# Altium PCB PowerBoard.PcbDoc
Units mm, origin at the board's own origin, x right, y up, seen from the top; angles counter-clockwise.
Board outline 99.95 x 99.44 mm, 2 copper layers (Top Layer, Bottom Layer); 81 components, 54 nets, 313 pads, 140 vias.
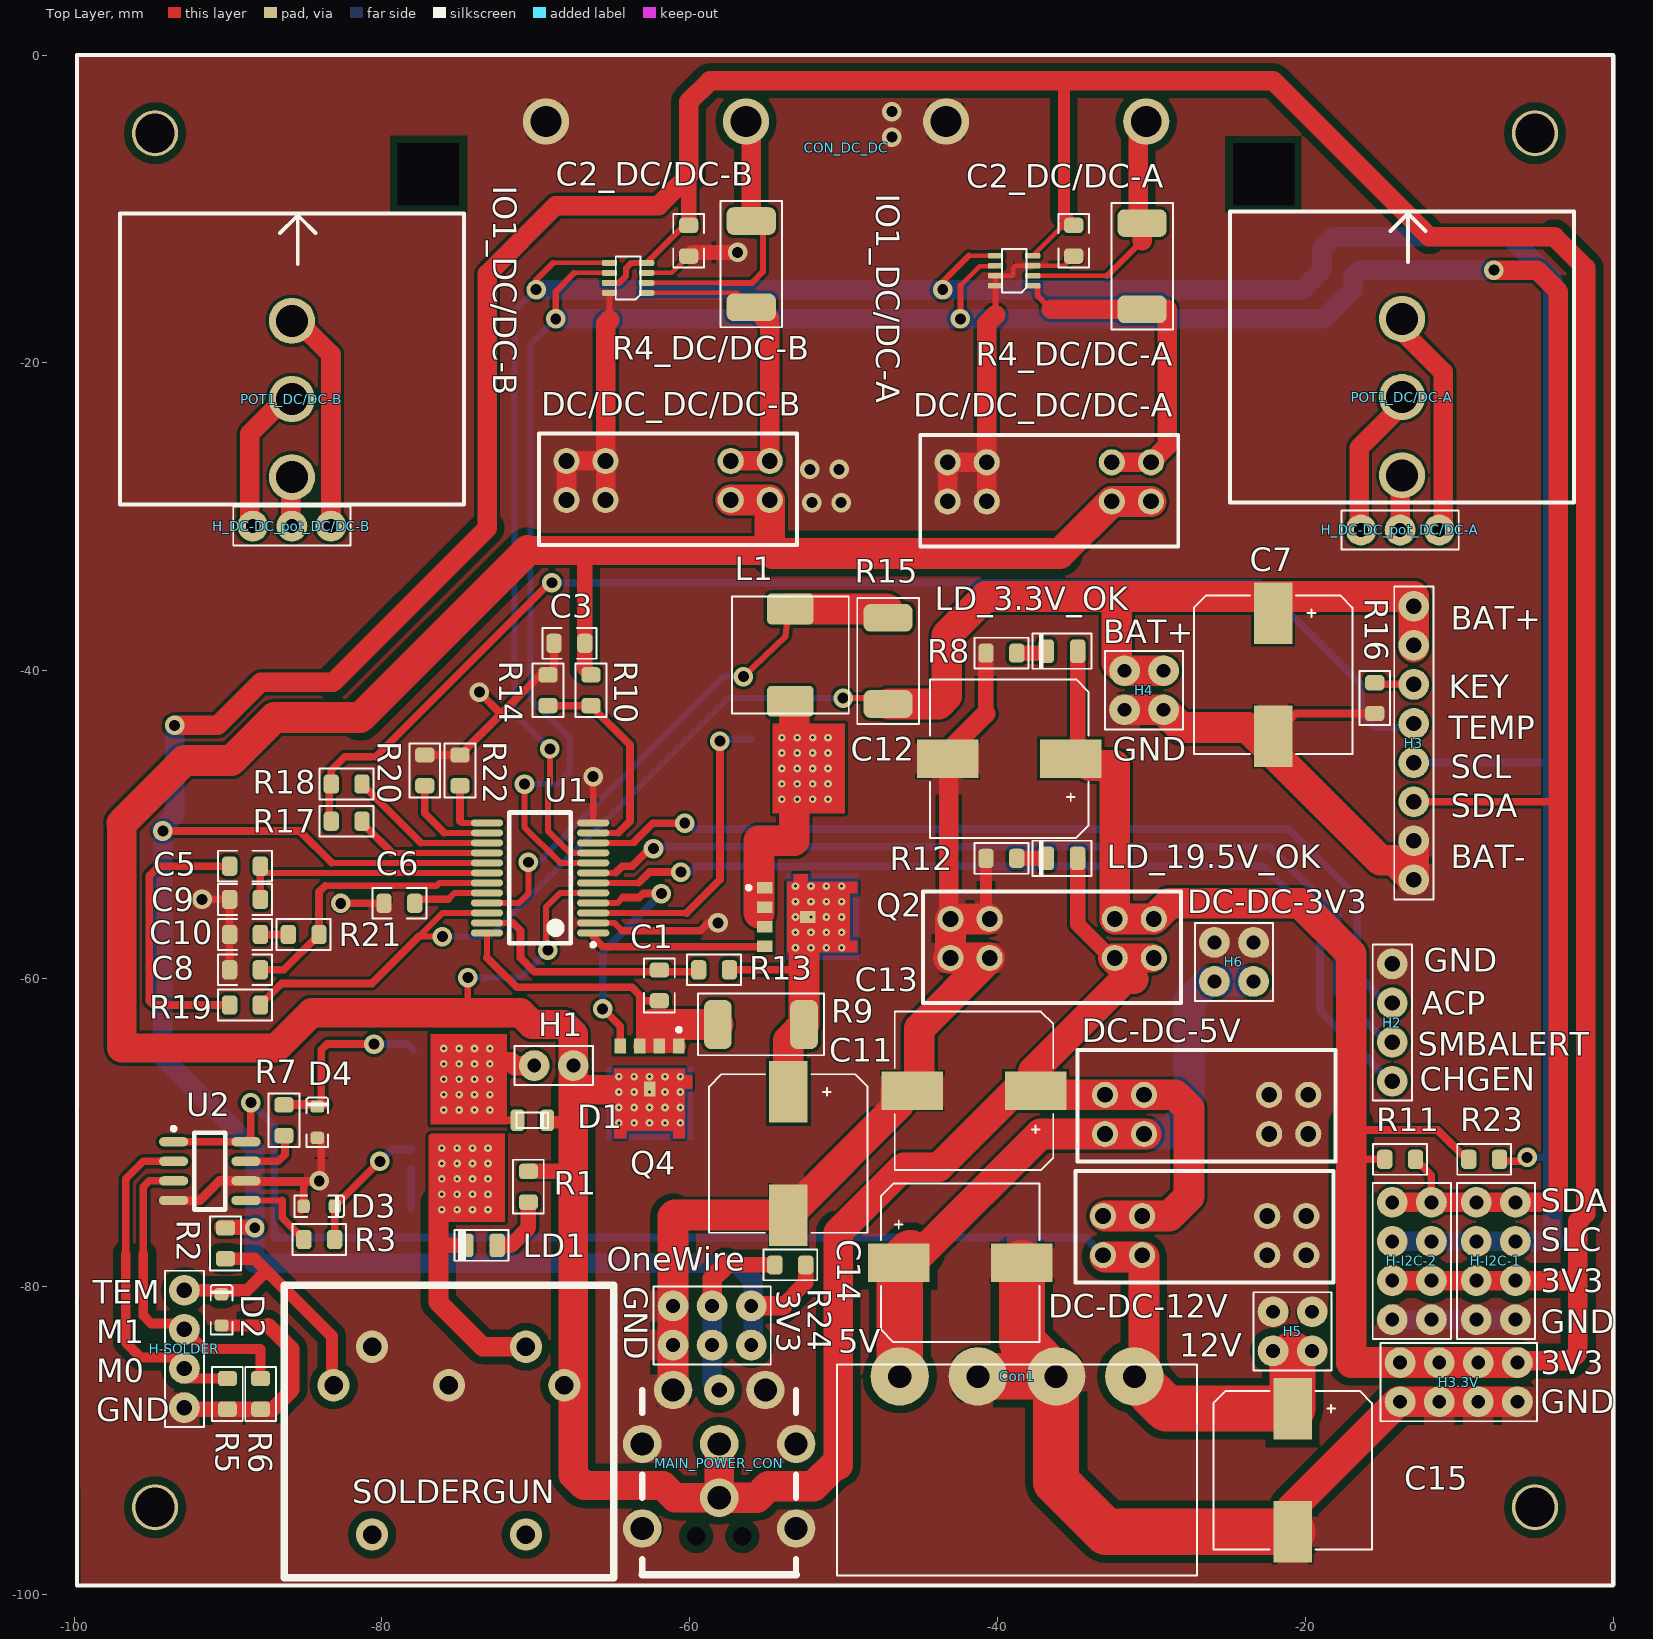
[diagram p0: Top Layer view]
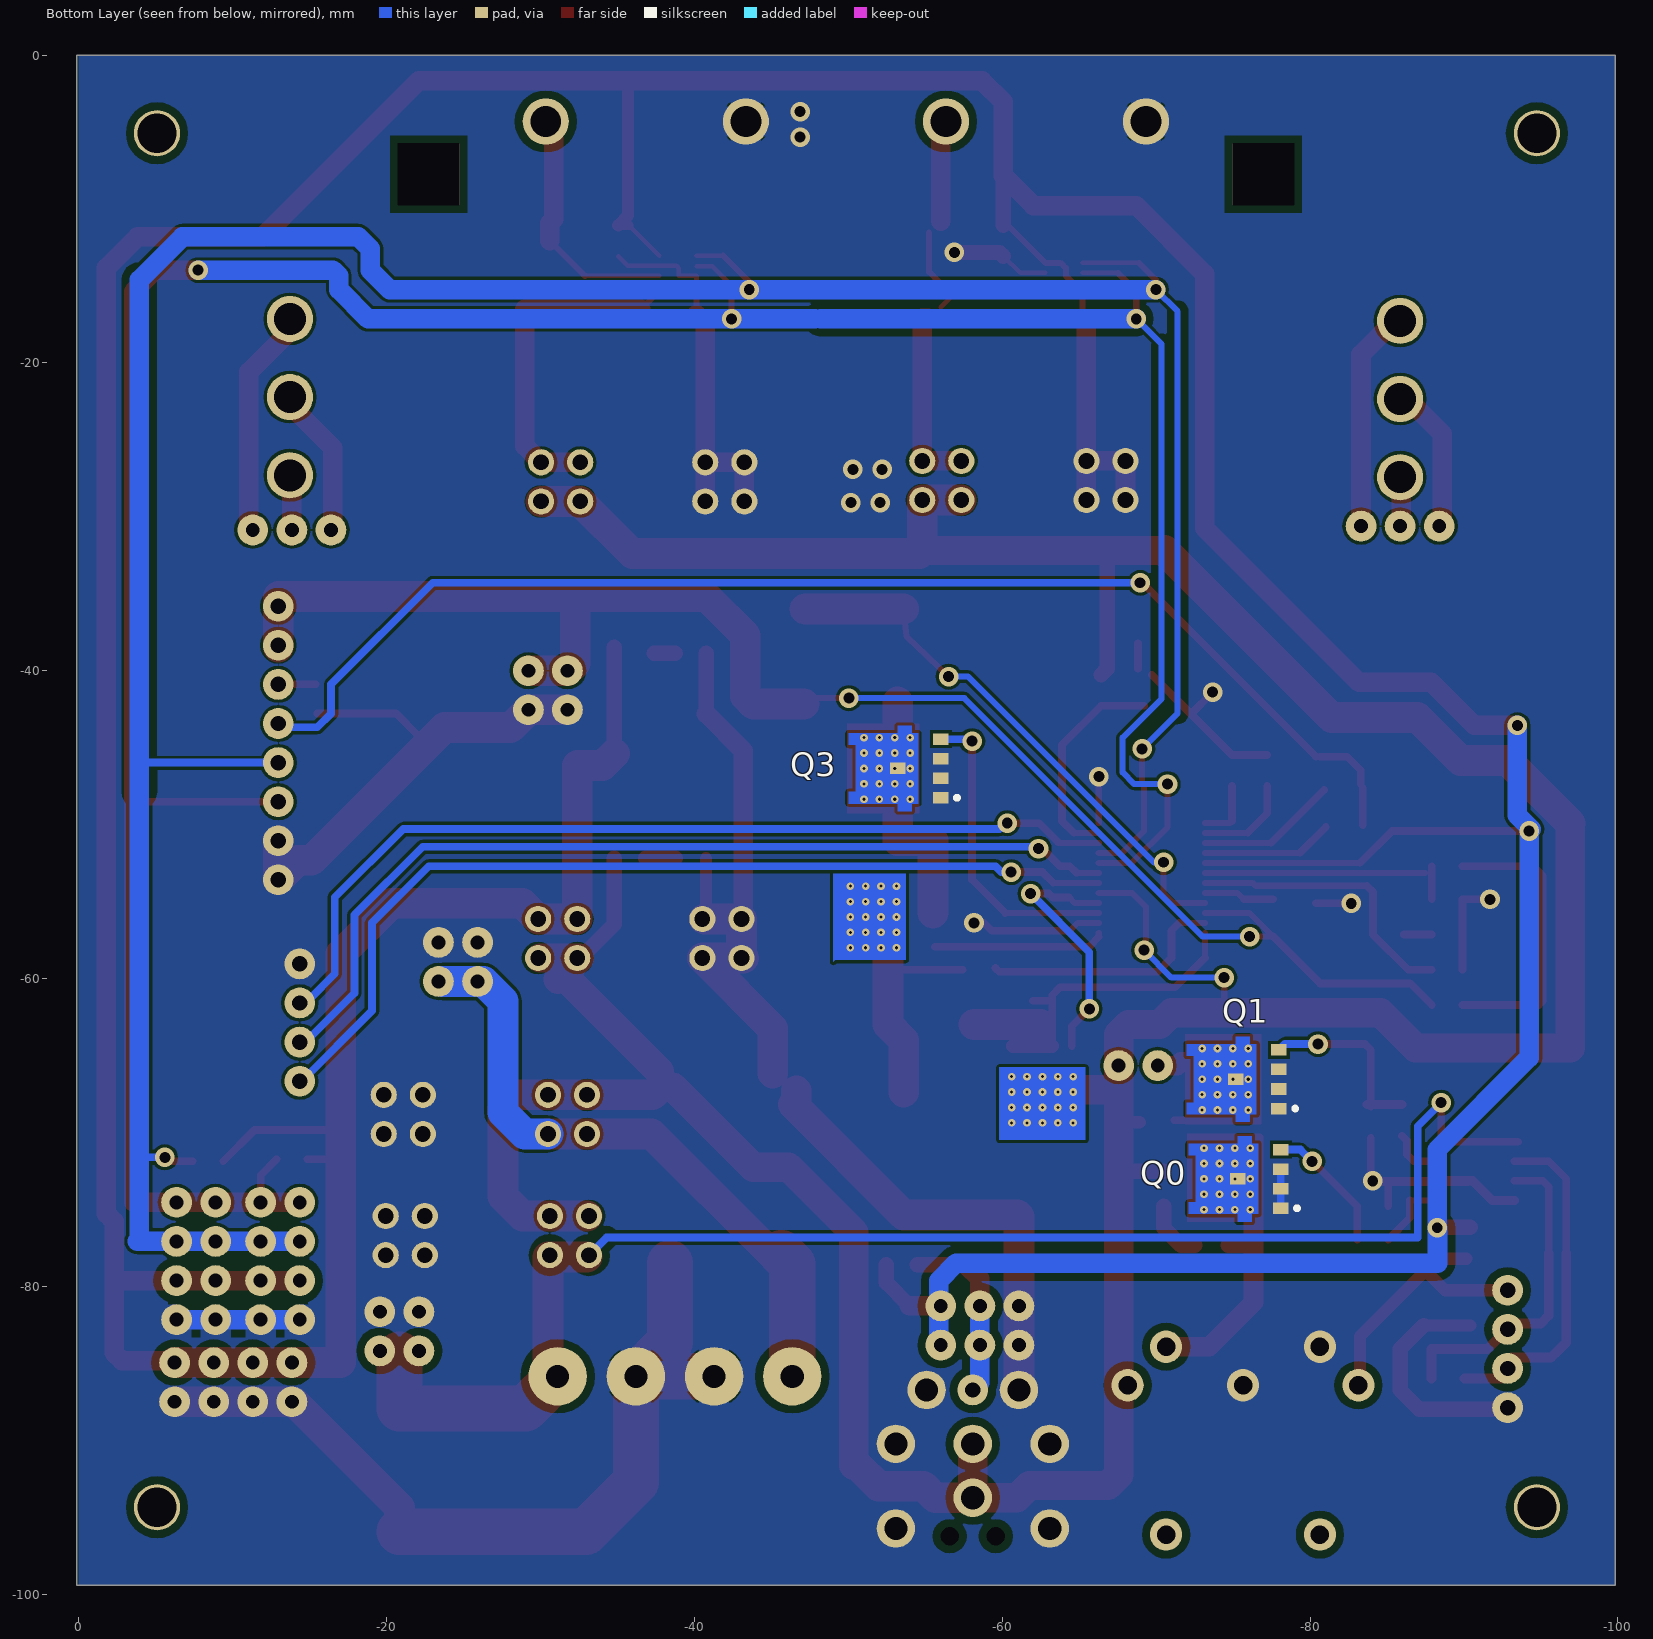
[diagram p1: Bottom Layer view, seen from below]
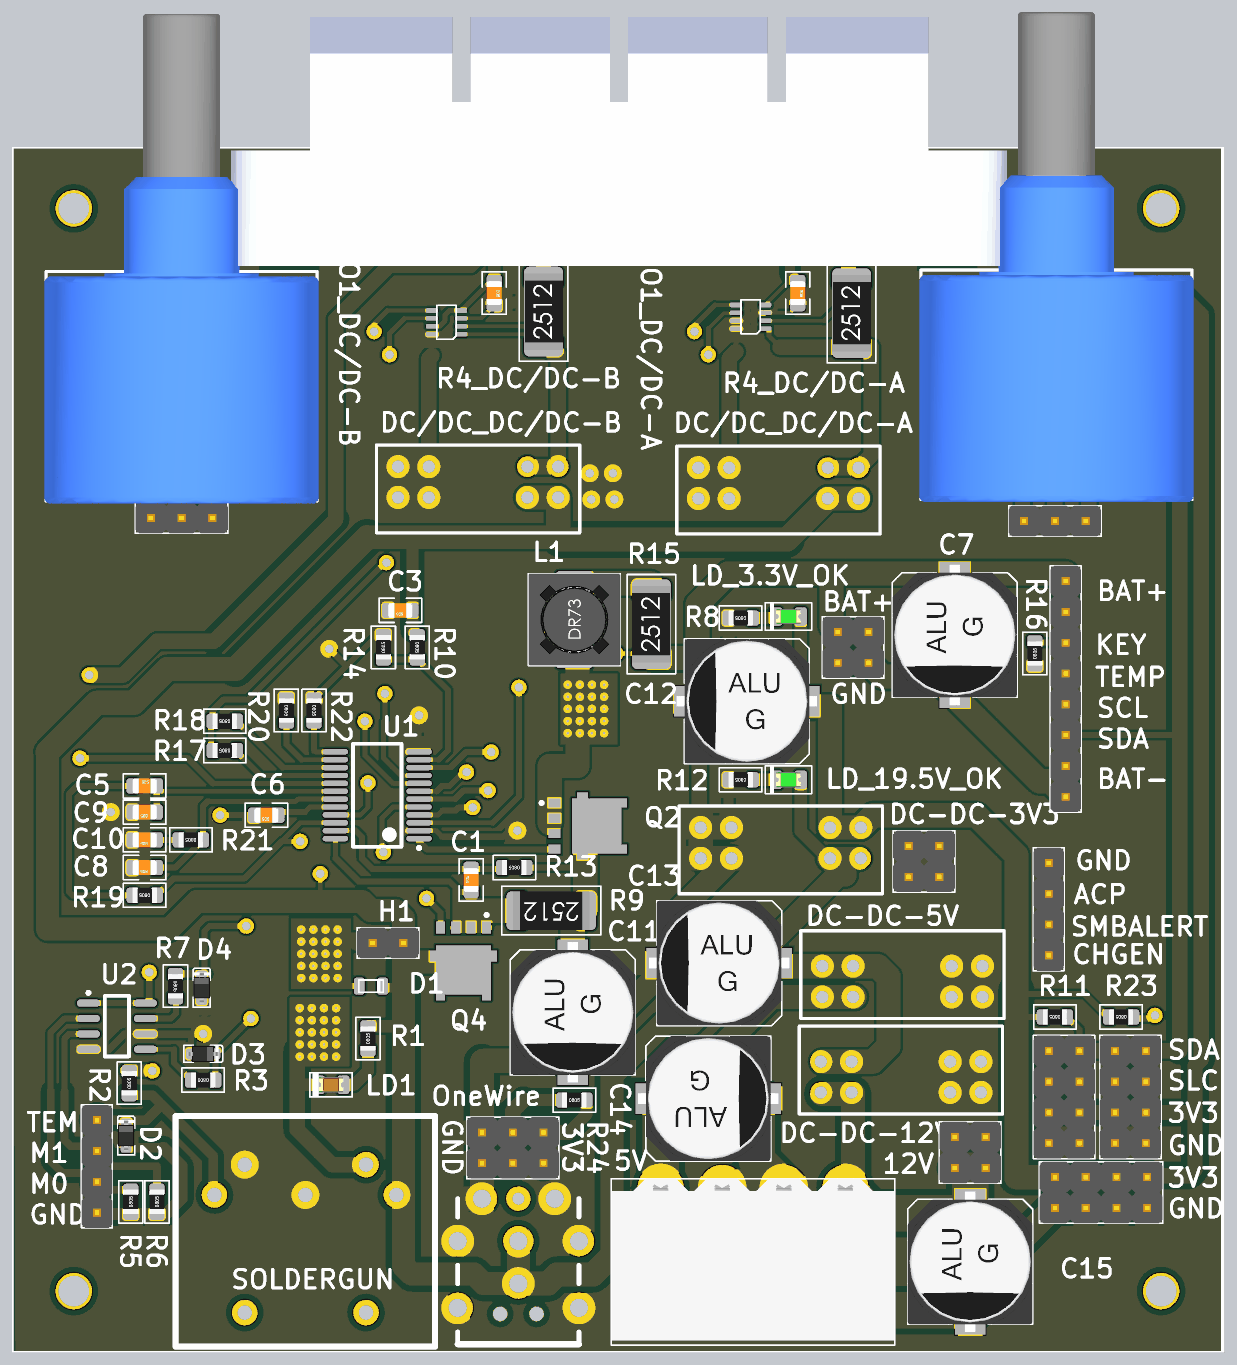
[diagram p2: 3D render of the assembled board from above, using the file's embedded part models]

## Layer stack, top to bottom
Top Solder: solder mask 0.0102, Solder Resist, Dk 3.5
Top Layer: signal copper 0.0356
Dielectric 1: dielectric 0.32, FR-4, Dk 4.8
Bottom Layer: signal copper 0.0356
Bottom Solder: solder mask 0.0102, Solder Resist, Dk 3.5

## Board outline
-99.822,-99.441 0.127,-99.441 0.127,0 -99.822,0

## Design rules (kind name [scope] priority, off if disabled: settings)
Clearance Clearance_polygon [InNamedPolygon('GND_pour')] p1: gap=1
Clearance Clearance_mosfetDriver [WithinRoom('room_mosfetDriver')] p2: gap=0.4
Clearance Clearance_ADCs [WithinRoom('DC/DC-A') Or WithinRoom('DC/DC-B')] p3: gap=0.2
Clearance Clearance_SMB_CHARGER [WithinRoom('SMB_CHARGER')] p4: gap=0.2
Clearance [All] p5: gap=0.5
PlaneClearance [All] p1: clearance=0.5
PlaneConnect [All] p1: planeconnectstyle=Relief reliefexpansion=0.508 reliefentries=4 reliefconductorwidth=2 reliefairgap=1
PolygonConnect [All] p1: connectstyle=Relief reliefconductorwidth=2 reliefentries=4 polygonreliefangle="90 Angle" airgapwidth=0.1
RoomDefinition DC/DC-B [InComponentClass('DC/DC-B')] p1: confinementstyle=ConfineIn formatcopy=TRUE lockcomponents=FALSE outline -99.505,-32.385 -48.451,-32.385 -48.451,-7.833 -99.505,-7.833
RoomDefinition DC/DC-A [InComponentClass('DC/DC-A')] p2: confinementstyle=ConfineIn formatcopy=TRUE lockcomponents=FALSE outline -48.197,-32.639 -1.842,-32.639 -1.842,-8.007 -48.197,-8.007
RoomDefinition SMB_CHARGER [InComponentClass('SMB_CHARGER')] p3: confinementstyle=ConfineIn formatcopy=TRUE lockcomponents=FALSE outline -98.933,-77.851 -0.635,-77.851 -0.635,-34.036 -98.933,-34.036
RoutingLayers RoutingLayers_19.5 [InNet('VCC19.5')] p1: top layer_v5=TRUE bottom layer_v5=FALSE
RoutingLayers RoutingLayers_GND [InNet('GND')] p2: top layer_v5=TRUE bottom layer_v5=TRUE
RoutingLayers [All] p3: top layer_v5=TRUE bottom layer_v5=TRUE
RoutingVias [All] p1: holewidth=0.711 width=1.27 viastyle="Through Hole" minholewidth=0.711 minwidth=1.27 maxholewidth=0.711 maxwidth=1.27
SMDNeckDown SMDNeckDown_smds [WithinRoom('DC/DC-A') Or WithinRoom('DC/DC-B')] p1: percent=120.000
SMDNeckDown [All] p2: percent=120.000
SilkToSilkClearance [All] p1: silktosilkclearance=0.01
SilkToSolderMaskClearance [IsPad] p1: minsilkscreentomaskgap=0.01 clearancetoexposedcopper=TRUE
SolderMaskExpansion [All] p1: expansion=0.102
Width Width_19.5 [InNet('VCC19.5')] p1: maxlimit=3 minlimit=0.17 preferedwidth=2
Width Width_adcs [WithinRoom('DC/DC-A') Or WithinRoom('DC/DC-B')] p2: maxlimit=3 minlimit=0.3 preferedwidth=1.27
Width Width_mosfetDriver [WithinRoom('room_mosfetDriver')] p3: maxlimit=1.27 minlimit=0.3 preferedwidth=0.5
Width Width_SMB_CHARGER [WithinRoom('SMB_CHARGER')] p4: maxlimit=2 minlimit=0.4 preferedwidth=0.5
Width [All] p5: maxlimit=3 minlimit=0.4 preferedwidth=1.27
25 further rules are at their usual default settings.

## Classes and differential pairs
channel class universal_DC-DC: DC/DC-A DC/DC-B
component class DC/DC-B: C2_DC/DC-B DC-DC-METER_DC/DC-B DC/DC_DC/DC-B H_DC-DC_pot_DC/DC-B IO1_DC/DC-B POT1_DC/DC-B R4_DC/DC-B
component class DC/DC-A: C2_DC/DC-A DC-DC-METER_DC/DC-A DC/DC_DC/DC-A H_DC-DC_pot_DC/DC-A IO1_DC/DC-A POT1_DC/DC-A R4_DC/DC-A
component class SMB_CHARGER: C1 C3 C5 C6 C7 C8 C9 C10 C11 H3 H4 L1 Q2 Q3 Q4 R9 R10 R13 R14 R15 R16 R17 R18 R19 R20 R21 R22 U1
net class I2C: SCL SDA

## Components (designator, comment, footprint, x,y, rotation, side; value= is the part's Value field where it differs from the comment)
C1 "100n" C0805(2013) -61.976,-60.452 r90 top
C2_DC/DC-A "100n" C0805(2013) -35.052,-12.065 r270 top (schematic designator C2)
C2_DC/DC-B "100n" C0805(2013) -60.071,-12.065 r270 top (schematic designator C2)
C3 "100n" C0805(2013) -67.818,-38.227 r180 top
C5 "10n" C0805(2013) -88.9,-52.705 r0 top
C6 "68n" C0805(2013) -78.867,-55.118 r180 top
C7 "20u" "EL SMD Case G D10x10.3 h10.2(1010)" -22.098,-40.259 r270 top
C8 "1.5n" C0805(2013) -88.9,-59.436 r180 top
C9 "100n" C0805(2013) -88.9,-54.864 r180 top
C10 "120n" C0805(2013) -88.9,-57.15 r180 top
C11 "20u" "EL SMD Case G D10x10.3 h10.2(1010)" -53.594,-71.374 r270 top
C12 "100u" "EL SMD Case G D10x10.3 h10.2(1010)" -39.243,-45.72 r180 top
C13 "100u" "EL SMD Case G D10x10.3 h10.2(1010)" -41.529,-67.31 r180 top
C14 "100u" "EL SMD Case G D10x10.3 h10.2(1010)" -42.418,-78.486 r0 top
C15 "100u" "EL SMD Case G D10x10.3 h10.2(1010)" -20.828,-91.948 r270 top
Con1 "PC-Power" "PC-Power 4x5.08" -38.735,-85.852 r0 top
CON_DC_DC "Speaker terminal 4P" "Speaker termina 4x DPS" -69.342,-4.318 r0 top
D1 "LL4148" Micro-Melf -70.231,-69.215 r0 top
D2 "3.3" SOD323 -90.424,-81.534 r90 top
D3 "6.2" SOD323 -84.074,-74.803 r0 top
D4 "6.2" SOD323 -84.201,-69.342 r90 top
DC-DC-3V3 "universal DC/DC" "MP1584EN dc/dc 3A vertical" -28.067,-60.452 r90 top
DC-DC-5V "universal DC/DC" "MP1584EN dc/dc 3A vertical" -34.798,-65.786 r270 top
DC-DC-12V "universal DC/DC" "MP1584EN dc/dc 3A vertical" -34.925,-73.66 r270 top
DC/DC_DC/DC-A "universal DC/DC" "MP1584EN dc/dc 3A vertical" -28.258,-30.781 r90 top (schematic designator DC/DC)
DC/DC_DC/DC-B "universal DC/DC" "MP1584EN dc/dc 3A vertical" -53.023,-30.693 r90 top (schematic designator DC/DC)
H1 "H-1x2" J1x2 -68.834,-65.659 r0 top
H2 "H-1x4" J1x4 -14.351,-62.865 r90 top
H3 "H-1x8" J1x8 -12.954,-44.704 r270 top
H3.3V "H-2x4" J2x4 -9.906,-86.106 r0 top
H4 "H-2x2" J2x2 -30.48,-41.275 r270 top
H5 "H-2x2" J2x2 -20.828,-82.931 r180 top
H6 "H-2x2" J2x2 -24.638,-58.928 r180 top
H-I2C-1 "H-2x4" J2x4 -7.493,-78.486 r270 top
H-I2C-2 "H-2x4" J2x4 -12.954,-78.486 r270 top
H-SOLDER "H-1x4" J1x4 -92.837,-84.074 r270 top
H_DC-DC_pot_DC/DC-A "H-1x3" J1x3 -13.843,-30.861 r180 top (schematic designator H_DC-DC_pot)
H_DC-DC_pot_DC/DC-B "H-1x3" J1x3 -85.852,-30.607 r180 top (schematic designator H_DC-DC_pot)
IO1_DC/DC-A "INA291" SOT23-8L -38.926,-14.017 r90 top (schematic designator IO1)
IO1_DC/DC-B "INA291" SOT23-8L -64.008,-14.478 r90 top (schematic designator IO1)
L1 "10u" Dr-SD-73 -53.467,-38.989 r0 top
LD1 "Led" "Led 0805-Red" -73.533,-77.343 r180 top
LD_3.3V_OK "Led" "Led 0805-Green" -35.814,-38.735 r180 top
LD_19.5V_OK "Led" "Led 0805-Green" -35.814,-52.197 r180 top
MAIN_POWER_CON "Centripin connector" Dell_centripin -53.086,-86.741 r180 top
OneWire "H-2x3" J2x3 -58.547,-82.55 r180 top
POT1_DC/DC-A "10K" "3590  potenciometer" -2.159,-10.16 r180 top (schematic designator POT1)
POT1_DC/DC-B "10K" "3590  potenciometer" -74.295,-10.287 r180 top (schematic designator POT1)
Q0 "NTMFS4833NT1G" ONSC-DFN-5-488AA_V -75.311,-73.025 r0 bottom
Q1 "NTMFS4833NT1G" ONSC-DFN-5-488AA_V -75.184,-66.548 r0 bottom
Q2 "NVTFS5116PLTAG" ONSC-DFN-5-488AA_V -52.324,-56.007 r0 top
Q3 "NTMFS4833NT1G" ONSC-DFN-5-488AA_V -53.213,-46.355 r0 bottom
Q4 "NVTFS5116PLTAG" ONSC-DFN-5-488AA_V -62.611,-67.183 r270 top
R1 "2K2" R0805 -70.485,-73.533 r90 top
R2 "100R" R0805 -90.17,-77.216 r90 top
R3 "100R" R0805 -84.074,-76.962 r180 top
R4_DC/DC-A "R020" R2512 -30.607,-13.722 r90 top (schematic designator R4)
R4_DC/DC-B "R020" R2512 -56.007,-13.589 r90 top (schematic designator R4)
R5 "10k" R0805 -90.043,-86.995 r90 top
R6 "10k" R0805 -87.884,-86.995 r90 top
R7 "100R" R0805 -86.36,-69.215 r270 top
R8 "390R" R0805 -39.751,-38.862 r180 top
R9 "R033" R2512 -55.372,-62.992 r180 top
R10 "13.7K" R0805 -66.421,-41.275 r270 top
R11 "4K7" R0805 -13.843,-71.755 r180 top
R12 "2k2" R0805 -39.751,-52.197 r180 top
R13 "100R" R0805 -58.42,-59.436 r180 top
R14 "1.21K" R0805 -69.215,-41.275 r90 top
R15 "R025" R2512 -47.117,-39.37 r90 top
R16 "100R" R0805 -15.494,-41.783 r90 top
R17 "1.13K" R0805 -82.296,-49.784 r180 top
R18 "54.9K" R0805 -82.296,-47.371 r180 top
R19 "100R" R0805 -88.9,-61.722 r180 top
R20 "10K" R0805 -77.216,-46.482 r270 top
R21 "6.04K" R0805 -85.09,-57.15 r180 top
R22 "10K" R0805 -74.93,-46.482 r270 top
R23 "4K7" R0805 -8.382,-71.755 r180 top
R24 "4K7" R0805 -53.467,-78.613 r0 top
SOLDERGUN "DIN-5" DIN-5 -80.645,-98.933 r0 top
U1 "LTC4100EG" LT-G-24_N -69.723,-53.467 r180 top
U2 "IR2101S" SO-8_L -91.186,-72.517 r0 top

## Footprints (in the part's own frame and the unit in brackets; to place one, negate y for a bottom-side part, rotate by r counter-clockwise, add the part's x,y. Pads: shape width x height; smd on the part's side, far side on the other; paste and mask are expansions set on the pad)
"3590  potenciometer" [mm] "3590 multiturn precise potenciometer"
  round 3 hole 2.08: 1(11.557,12.065) 2(11.557,17.145) 3(11.557,6.985)
  silkscreen extent 0.38,0 22.73,18.92, body extent 0.26,-21.26 22.86,19.14, height 23.3
C0805(2013) [mm]
  rrect50% 1x1.25 smd: 1(-1,0) 2(1,0)
  silkscreen extent -1.75,-1 1.75,1, body extent -1,-0.62 1,0.63, height 0.73
Dell_centripin [mm]
  round 2.5 hole 1.5: 0(0,9) 0(0,3.5) 0(10,9) 0(10,3.5) 1(2,0) 1(8,0) 3(5,3.5) 3(5,7)
  round 2 hole 1: 2(5,0)
  round 0 hole 1.2: 12(3.5,9.5) 13(6.5,9.5)
  silkscreen extent 0,0 10,12
DIN-5 [mm] "midi connector"
  round 2.1 hole 1.2: 0(0,2.8) 0(10,2.8) 1(-2.5,12.5) 2(0,15) 3(5,12.5) 4(10,15) 5(12.5,12.5)
  silkscreen extent -5.7,0 15.7,19
Dr-SD-73 [mm] "7x7x3.2mm"
  rrect25% 3x2 smd: 1(0,-3) 2(0,3)
  silkscreen extent -3.8,-3.8 3.8,3.8, body extent -3.8,-3.8 3.8,3.8, height 3.55
"EL SMD Case G D10x10.3 h10.2(1010)" [mm]
  rect 4x2.5 smd mask+0.102: 1(-4,0) 2(4,0)
  silkscreen extent -5.15,-5.15 5.15,5.15, body extent -5.8,-5.15 5.8,5.15, height 10.2
J1x2 [mm]
  round 2 hole 0.9: 1(-1.27,0) 2(1.27,0)
  silkscreen extent -2.54,-1.27 2.54,1.27, body extent -2.54,-1.27 2.54,1.27, height 10.1
J1x3 [mm]
  round 2 hole 0.9: 1(-2.54,0) 2(0,0) 3(2.54,0)
  silkscreen extent -3.81,-1.27 3.81,1.27, body extent -3.81,-1.27 3.81,1.27, height 10.1
J1x4 [mm]
  round 2 hole 1: 1(-3.81,0) 2(-1.27,0) 3(1.27,0) 4(3.81,0)
  silkscreen extent -5.08,-1.27 5.08,1.27, body extent -5.08,-1.27 5.08,1.27, height 10.1
J1x8 [mm]
  round 2 hole 1: 1(-8.89,0) 2(-6.35,0) 3(-3.81,0) 4(-1.27,0) 5(1.27,0) 6(3.81,0) 7(6.35,0) 8(8.89,0)
  silkscreen extent -10.16,-1.27 10.16,1.27, body extent -10.16,-1.27 10.16,1.27, height 10.1
J2x2 [mm]
  round 2 hole 0.9: 1(-1.27,-1.27) 2(-1.27,1.27) 3(1.27,-1.27) 4(1.27,1.27)
  silkscreen extent -2.54,-2.54 2.54,2.54, body extent -2.54,-2.54 2.54,2.54, height 10.1
J2x3 [mm]
  round 2 hole 0.9: 1(-2.54,-1.27) 2(-2.54,1.27) 3(0,-1.27) 4(0,1.27) 5(2.54,-1.27) 6(2.54,1.27)
  silkscreen extent -3.81,-2.54 3.81,2.54, body extent -3.81,-2.54 3.81,2.54, height 10.1
J2x4 [mm]
  round 2 hole 0.9: 1(-3.937,-1.397) 2(-3.937,1.143) 3(-1.397,-1.397) 4(-1.397,1.143) 5(1.143,-1.397) 6(1.143,1.143) 7(3.683,-1.397) 8(3.683,1.143)
  silkscreen extent -5.21,-2.67 4.95,2.41, body extent -5.21,-2.67 4.95,2.41, height 10.1
"Led 0805-Green" [mil]
  rrect50% 40x60 smd: 1(-40,0) 2(40,0)
  silkscreen extent -75,-45 75,45, body extent -40,-25 40,25, height 43
"Led 0805-Red" [mil]
  rrect50% 40x60 smd: 1(-40,0) 2(40,0)
  silkscreen extent -69,-40 69,40, body extent -40,-25 40,25, height 43
LT-G-24_N [mm] "SOP, 24-Leads, Body 8.5x5.6mm, Pitch 0.65mm, IPC Medium Density"
  oval 2.1x0.45 smd: 1(-3.45,3.575) 2(-3.45,2.925) 3(-3.45,2.275) 4(-3.45,1.625) 5(-3.45,0.975) 6(-3.45,0.325) 7(-3.45,-0.325) 8(-3.45,-0.975) 9(-3.45,-1.625) 10(-3.45,-2.275) 11(-3.45,-2.925) 12(-3.45,-3.575) 13(3.45,-3.575) 14(3.45,-2.925) 15(3.45,-2.275) 16(3.45,-1.625) 17(3.45,-0.975) 18(3.45,-0.325) 19(3.45,0.325) 20(3.45,0.975) 21(3.45,1.625) 22(3.45,2.275) 23(3.45,2.925) 24(3.45,3.575)
  silkscreen extent -3.58,-4.25 2,4.47, body extent -2.8,-4.25 2.8,4.25, height 2
Micro-Melf [mil]
  rrect50% 35x55 smd: 1(-38,0) 2(38,0)
  silkscreen extent -40,-20 40,20
"MP1584EN dc/dc 3A vertical" [mm]
  round 1.7 hole 1.02: 0(1.778,4.318) 0(1.778,1.778) 1(1.778,14.986) 1(1.778,12.446) 2(4.318,1.778) 2(4.318,4.318) 3(4.318,12.446) 3(4.318,14.986)
  silkscreen extent -1.14,0 6.1,16.76
ONSC-DFN-5-488AA_V [mm] "DFN, 5-Leads, Body 5.9x4.9mm, Pitch 1.27mm"
  rect 1x0.75 smd: 1(-2.795,1.905) 2(-2.795,0.635) 3(-2.795,-0.635) 4(-2.795,-1.905)
  rect 1x0.75 smd paste+0 mask+0: 5(0,0)
  Top Layer region: -0.905,-2.775 -0.905,-2.28 -1.33,-2.28 -1.33,2.28 -0.905,2.28 -0.905,2.775 0,2.775 0,2.28 3.2,2.28 3.2,1.53 2.725,1.53 2.725,-1.53 3.2,-1.53 3.2,-2.28 0,-2.28 0,-2.775
  silkscreen extent -3.97,1.78 -3.72,2.03, body extent -2.95,-2.45 2.95,2.45, height 1.1
"PC-Power 4x5.08" [mm]
  round 3.8 hole 1.5: 1(-7.62,0) 2(-2.54,0) 3(2.54,0) 4(7.62,0)
  silkscreen extent -11.68,-12.95 11.68,0.76, body extent -11.63,-12.93 11.63,0.76, height 8.74
R0805 [mm]
  rrect50% 1x1.25 smd: 1(-1,0) 2(1,0)
  silkscreen extent -1.75,-1 1.75,1, body extent -1,-0.62 1,0.63, height 0.6
R2512 [mm]
  rrect50% 1.8x3.2 smd: 1(-2.8,0) 2(2.8,0)
  silkscreen extent -4.1,-2 4.1,2, body extent -3.16,-1.6 3.16,1.6, height 0.62
SO-8_L [mm] "SOIC, 8-Leads, Body 4.9x3.9mm, Pitch 1.27mm, IPC High Density"
  oval 1.9x0.6 smd: 1(-2.35,1.905) 2(-2.35,0.635) 3(-2.35,-0.635) 4(-2.35,-1.905) 5(2.35,-1.905) 6(2.35,-0.635) 7(2.35,0.635) 8(2.35,1.905)
  silkscreen extent -2.47,-2.5 1,2.88, body extent -1.95,-2.45 1.95,2.45, height 1.75
SOD323 [mm]
  rrect50% 0.8x0.9 smd: 1(-1.016,0) 2(1.016,0)
  silkscreen extent -1.6,-0.76 1.6,0.7, body extent -1.3,-0.67 1.3,0.67, height 1.1
SOT23-8L [mil] "SOT23, 8-Leads, Body 2.9x1.3mm, Pitch 0.95mm, Lead Span 2.5mm"
  rrect50% 15x39 smd mask-1000: 1(-38.39,-47.5) 2(-12.8,-47.5) 3(12.79,-47.5) 4(38.39,-47.5) 5(38.39,47.5) 6(12.79,47.5) 7(-12.8,47.5) 8(-38.39,47.5)
  silkscreen extent -55,-31 55,31
"Speaker termina 4x DPS" [mm]
  round 3 hole 2: 0(39,0) 1(26,0) 2(13,0) 3(0,0)
  rect 4x4 hole 4 square unplated paste+0 mask+0: 4(-7.62,-3.429) 5(46.609,-3.429)
  body extent -12.44,-5.5 51.56,15, height 20

## Part data
C1 C2_DC/DC-A C2_DC/DC-B C3 C5 C6 C8 C9 C10: library part "C-0805  100V 10n", "SMD-0805 100V X7R 10%"
C7 C11 C12 C13 C14 C15: library part "EL 100u/35V", "EL 35V SMD Case G D10x10.3h10.5"
Con1: library part "PC-Power 4x5.08", "PC-Power 4x5.08"
D1: library part MCL4148, "SMD Micro-Melf 75V 0.3A"
D2: library part ZD3.3, "3.3V 0.2W"
D3 D4: library part ZD6.2, "6.2V 0.2W"
IO1_DC/DC-A IO1_DC/DC-B: "Zero-Drift, Bi-Directional  CURRENT/POWER MONITOR with I2C™ Interface"
L1: library part "L-SD-73 10uH", "2.1A 0.08om 7x7x3.2mm"
LD1: library part "Led 0805 KP-2012EC", "Red  627nm 12mcd"
LD_3.3V_OK LD_19.5V_OK: library part "Led 0805 KP-2012SGC", "Green 565nm 15mcd"
POT1_DC/DC-A POT1_DC/DC-B: library part Potenciometer
Q0 Q1 Q3: "Power MOSFET, 30 V, 191 A, Single N-Channel, 5-Pin DFN, Pb-Free, Tape and Reel"
Q2 Q4: "Power MOSFET, -60 V, -14 A, 52 mOhm, Single P-Channel, 8-Pin WDFN, Pb-Free, Tape and Reel"
R1 R2 R3 R4_DC/DC-A R4_DC/DC-B R5 R6 R7 R8 R9 R10 R11 R12 R13 R14 R15 R16 R17 R18 R19 R20 R21 R22 R23 R24: library part R-0805, "SMD 0805 0.1W 5% 150V"
U1: "Smart Battery Charger Controller, 6 to 28 V Vin, 24-pin SOP (G-24), -40 to 85 degC"
U2: "High and Low Side Driver"

## Free pads (board coordinates)
  round 3 hole 2.54 unplated: 0(-94.742,-94.361) 0(-94.742,-5.08) 0(-5.08,-94.361) 0(-5.08,-5.08)

## Via types
v1: diameter 0.5, hole 0.2, Top Layer to Bottom Layer, 100 vias
v2: diameter 1.27, hole 0.711, Top Layer to Bottom Layer, 40 vias

## Nets (pads, with @x,y where several pads share a name; then routed paths per layer and width w, separated by ;. In a path a pad name is that pad's centre, name@x,y a point inside that pad or via, vN(x,y) a via of type N, cw(c..) or ccw(c..) an arc to the next point about the centre after c; other vN are vias at no path point)
1WIRE: MAIN_POWER_CON.2 OneWire.3 OneWire.4 R24.1 | length 11.2
  Top Layer w1: -57.658,-78.613 R24.1
  Top Layer w1.27: OneWire.3 -58.547,-79.502 -57.658,-78.613
  Bottom Layer w1.27: MAIN_POWER_CON.2@-58.547,-86.28 OneWire.4 OneWire.3
DC-DC-LOAD-A: CON_DC_DC.0 IO1_DC/DC-A.2 R4_DC/DC-A.2 | length 15.9
  Top Layer w0.3: IO1_DC/DC-A.2 -32.884,-14.342
  Top Layer w0.4: -32.884,-14.342 -30.607,-12.065
  Top Layer w1.27: CON_DC_DC.0@-30.861,-4.318 -30.861,-10.668 R4_DC/DC-A.2 -30.607,-12.065
DC-DC-LOAD-B: CON_DC_DC.2 IO1_DC/DC-B.2 R4_DC/DC-B.2 | length 16.9
  Top Layer w0.3: IO1_DC/DC-B.2 -57.983,-14.803
  Top Layer w0.4: -57.983,-14.803 -55.951,-14.803 -55.245,-14.097 R4_DC/DC-B.2@-55.245,-11.551
  Top Layer w1.27: R4_DC/DC-B.2 CON_DC_DC.2@-56.007,-4.318
GND: C2_DC/DC-A.2 C2_DC/DC-B.2 C3.2 C6.2 C7.2 C8.2 C9.2 C10.2 C11.2 C12.2 C13.2 C14.2 C15.2 Con1.2 Con1.3 CON_DC_DC.1 CON_DC_DC.3 D2.1 D3.1 D4.1 DC-DC-3V3.1 DC-DC-3V3.3 DC-DC-5V.1 DC-DC-5V.3 DC-DC-12V.1 DC-DC-12V.3 DC/DC_DC/DC-A.1 DC/DC_DC/DC-A.3 DC/DC_DC/DC-B.1 DC/DC_DC/DC-B.3 H2.4 H3.3V.1 H3.3V.3 H3.3V.5 H3.3V.7 H3.7 H3.8 H4.3 H4.4 H5.1 H5.3 H6.1 H6.3 H-I2C-1.7 H-I2C-1.8 H-I2C-2.7 H-I2C-2.8 H-SOLDER.4 IO1_DC/DC-A.3 IO1_DC/DC-A.7 IO1_DC/DC-A.8 IO1_DC/DC-B.3 IO1_DC/DC-B.8 MAIN_POWER_CON.0 MAIN_POWER_CON.1 OneWire.5 OneWire.6 Q0.1 Q0.2 Q0.3 Q1.1 Q1.2 Q1.3 Q3.1 Q3.2 Q3.3 R5.1 R6.1 R8.2 R12.2 R14.2 R16.1 R20.1 R22.1 SOLDERGUN.2 SOLDERGUN.3 U1.2 U1.12 U2.4 U2.6 | length 284.9
  Top Layer w0.3: IO1_DC/DC-B.3 -61.159,-14.153 C2_DC/DC-B.2 ; IO1_DC/DC-A.8 IO1_DC/DC-A.7 ; IO1_DC/DC-A.7@-40.123,-14.351 -38.989,-14.351 -38.989,-13.843 -38.838,-13.692 IO1_DC/DC-A.3 -35.679,-13.692 C2_DC/DC-A.2
  Top Layer w0.4: U1.2 -64.893,-56.392 -64.389,-56.896 ; U1.12 v2(-66.273,-46.884) ; -65.215,-17.208 IO1_DC/DC-B.8 ; -40.132,-16.891 IO1_DC/DC-A.8
  Top Layer w0.5: v2(-91.694,-54.864) C9.2 C8.2 ; -85.217,-73.188 -85.09,-73.315 D3.1 ; v2@-83.947,-73.188 D4.1@-83.947,-70.358 ; v2(-82.677,-55.118) -80.375,-55.118 ; R20.1 R22.1 -72.263,-42.815 ; v2(-73.676,-41.402) -72.263,-42.815 ; R14.2@-69.723,-40.275 -72.263,-42.815 ; R14.2@-68.818,-39.878 C3.2 ; -64.389,-56.896 -59.309,-56.896 -58.801,-56.388 v2(-58.166,-56.388) ; C7.2 -20.622,-42.783 R16.1
  Top Layer w0.6: U2.4@-93.282,-74.422 -91.821,-74.422 -90.551,-73.152 -88.582,-73.152 U2.6@-88.582,-73.188 ; -90.233,-73.188 U2.6@-88.582,-73.188 ; v2@-83.947,-73.188 -85.217,-73.188 U2.6@-88.582,-73.188
  Top Layer w0.8: D2.1 -87.376,-82.55 ; R12.2 -40.751,-56.023 DC-DC-3V3.3@-40.64,-56.134
  Top Layer w1: H-SOLDER.4@-92.98,-87.995 -87.106,-87.995 -85.852,-86.741 -85.852,-84.074 -87.376,-82.55 ; C2_DC/DC-B.2 -59.833,-12.827 v2(-56.896,-12.827) ; -40.767,-42.799 R8.2@-40.767,-38.862
  Top Layer w1.27: H-SOLDER.4@-93.091,-87.884 H-SOLDER.4@-92.98,-87.995 ; DC/DC_DC/DC-B.1@-68.008,-28.915 -68.008,-26.375 DC/DC_DC/DC-B.3@-65.468,-26.375 ; DC/DC_DC/DC-B.1@-65.468,-28.915 DC/DC_DC/DC-B.3@-65.468,-26.375 ; -65.215,-17.208 -65.468,-17.462 DC/DC_DC/DC-B.3@-65.468,-26.375 ; DC/DC_DC/DC-A.1@-43.243,-29.003 -43.243,-26.463 DC/DC_DC/DC-A.3@-40.703,-26.463 ; DC-DC-3V3.3@-43.18,-56.134 -43.18,-45.212 -40.767,-42.799 ; DC/DC_DC/DC-A.1@-40.703,-29.003 DC/DC_DC/DC-A.3@-40.703,-26.463 ; -40.132,-16.891 -40.703,-17.462 DC/DC_DC/DC-A.3@-40.703,-26.463
  Top Layer w2: MAIN_POWER_CON.1@-61.086,-86.741 -61.086,-75.469 -60.991,-75.374 C11.2 -46.419,-68.199 -46.609,-68.199 C13.2@-46.609,-67.31 ; C13.2@-45.085,-66.167 -45.085,-63.246 DC-DC-3V3.1@-40.577,-58.737 ; DC-DC-3V3.1@-43.18,-58.674 DC-DC-3V3.1@-43.117,-58.61 ; DC-DC-3V3.1@-43.053,-58.674 DC-DC-3V3.1@-40.513,-58.674 ; DC-DC-3V3.1@-43.053,-58.547 -43.053,-56.134 DC-DC-3V3.3@-40.64,-56.134 ; H4.3 H4.4 -28.067,-43.688 -23.749,-43.688 -15.113,-52.324 -14.224,-52.324 H3.8 H3.7 ; C15.2 -20.828,-94.361 -13.97,-87.503 H3.3V.7
  Top Layer w3: Con1.2 Con1.3 ; C14.2 -38.418,-83.629 Con1.3 ; C15.2 -32.957,-95.948 -36.195,-92.71 Con1.3
  Bottom Layer w0.5: Q0.1 Q0.2 Q0.3
  Bottom Layer w1.27: DC/DC_DC/DC-A.3@-43.243,-26.463 DC/DC_DC/DC-A.3@-43.222,-26.441 ; DC/DC_DC/DC-A.3@-40.725,-26.441 DC/DC_DC/DC-A.3@-40.703,-26.463 ; H-I2C-2.7 H-I2C-2.8 H-I2C-1.7 H-I2C-1.8
  other v2: -84.074,-73.152 -52.07,-29.083 -50.165,-29.083 -52.197,-26.924 -50.292,-26.924 -46.863,-5.334 -46.863,-3.683
MOS-0: H-SOLDER.3 R5.2 U2.2 | length 22.5
  Top Layer w0.5: -96.647,-77.851 -96.647,-73.025 -95.504,-71.882 U2.2@-93.282,-71.882
  Top Layer w0.635: -96.647,-77.851 -96.647,-83.651 -96.139,-84.159 -95.669,-84.629 -93.091,-84.629 -93.091,-85.344 -92.44,-85.995 R5.2
MOS-1: H-SOLDER.2 R6.2 U2.3 | length 21.2
  Top Layer w0.5: -95.504,-77.851 -95.504,-73.533 -95.123,-73.152 U2.3@-93.282,-73.152
  Top Layer w0.635: -95.504,-77.851 -95.504,-81.915 -94.996,-82.423 -93.472,-82.423 -93.091,-82.804 -92.807,-82.804 -91.537,-84.074 -87.884,-84.074 R6.2
NetC1_1: C1.1 Q4.1 Q4.2 Q4.3 R9.2 U1.24 | length 24.5
  Top Layer w0.4: -73.173,-58.653 U1.24 ; -62.865,-64.135 -62.865,-63.627
  Top Layer w0.5: -73.173,-58.653 -71.247,-60.579 -63.754,-60.579 -63.246,-61.087 Q4.3 ; -63.23,-61.452 C1.1
  Top Layer w0.9: Q4.3 Q4.2 Q4.1
  Top Layer w2: -62.484,-62.992 R9.2
NetC1_2: C1.2 R13.2 U1.23 | length 16.1
  Top Layer w0.4: U1.23 -71.497,-56.392
  Top Layer w0.5: -71.497,-56.392 -70.993,-56.896 -70.993,-58.674 -70.104,-59.563 -59.801,-59.563 R13.2@-59.563,-59.325
NetC5_1: C5.1 R19.2 | length 18.9
  Top Layer w0.5: R19.2 -94.869,-61.722 -95.123,-61.468 -95.123,-53.34 -94.488,-52.705 C5.1
NetC5_2: C5.2 C9.1 U1.18 | length 16.4
  Top Layer w0.4: C5.2@-87.463,-53.142 U1.18
  Top Layer w0.5: C9.1 C5.2
NetC6_1: C6.1 U1.20 | length 4.6
  Top Layer w0.4: -75.692,-54.864 -75.27,-54.442 U1.20
  Top Layer w0.5: C6.1@-77.613,-54.864 -75.692,-54.864
NetC8_1: C8.1 R21.1 U1.19 | length 18.7
  Top Layer w0.4: -83.693,-53.975 -76.454,-53.975 -76.271,-53.792 U1.19
  Top Layer w0.5: C8.1 -86.376,-59.436 R21.1 -84.09,-54.372 -83.693,-53.975
NetC10_1: C10.1 R21.2 | length 1.8
  Top Layer w0.5: C10.1 R21.2
NetC11_1: C11.1 Q2.5 R9.1 R13.1 | length 17.3
  Top Layer w0.5: R13.1 -52.826,-59.436
  Top Layer w2: C11.1 -53.594,-64.014 R9.1 -52.572,-55.124
  other v1: -53.126,-58.007 -52.126,-58.007 -51.126,-58.007 -50.126,-58.007 -53.126,-57.007 -52.126,-57.007 -51.126,-57.007 -50.126,-57.007 -53.126,-56.007 -52.126,-56.007 -51.126,-56.007 -50.126,-56.007 -53.126,-55.007 -52.126,-55.007 -51.126,-55.007 -50.126,-55.007 -53.126,-54.007 -52.126,-54.007 -51.126,-54.007 -50.126,-54.007
NetD1_1: D1.1 H1.1 Q1.5 | length 5.8
  Top Layer w0.5: v1(-72.986,-68.548) -72.319,-69.215 D1.1
  Top Layer w1.27: -73.748,-65.421 -71.612,-65.421 -71.374,-65.659 H1.1
  other v1: -75.986,-68.548 -74.986,-68.548 -73.986,-68.548 -75.986,-67.548 -74.986,-67.548 -73.986,-67.548 -72.986,-67.548 -75.986,-66.548 -74.986,-66.548 -73.986,-66.548 -72.986,-66.548 -75.986,-65.548 -74.986,-65.548 -73.986,-65.548 -72.986,-65.548 -75.986,-64.548 -74.986,-64.548 -73.986,-64.548 -72.986,-64.548
NetD3_2: D3.2 Q0.4 R3.1 | length 8.6
  Top Layer w0.5: R3.1 -83.074,-74.819 D3.2 v2(-80.137,-71.882)
  Bottom Layer w0.5: v2(-80.137,-71.882) -79.375,-71.12 Q0.4
NetD4_2: D4.2 Q1.4 R7.1 | length 12.3
  Top Layer w0.5: D4.2@-83.947,-68.326 -83.947,-68.199 -83.947,-64.643 -83.566,-64.262 v2(-80.518,-64.262)
  Top Layer w0.6: R7.1@-85.979,-68.199 -83.947,-68.199 -83.693,-68.199
  Bottom Layer w0.5: v2(-80.518,-64.262) -78.36,-64.262 Q1.4
NetDC/DC_DC/DC-A_2: DC/DC_DC/DC-A.2 IO1_DC/DC-A.1 R4_DC/DC-A.1 | length 22.7
  Top Layer w0.381: IO1_DC/DC-A.1 -37.414,-14.992 -37.414,-15.621 -36.513,-16.522
  Top Layer w1.27: -36.513,-16.522 R4_DC/DC-A.1 -28.981,-16.522 -28.981,-25.409 -30.035,-26.463 DC/DC_DC/DC-A.2@-32.575,-26.463
NetDC/DC_DC/DC-B_2: DC/DC_DC/DC-B.2 IO1_DC/DC-B.1 R4_DC/DC-B.1 | length 19.4
  Top Layer w0.3: IO1_DC/DC-B.1 -56.943,-15.453 R4_DC/DC-B.1
  Top Layer w1.27: DC/DC_DC/DC-B.2@-57.34,-26.375 -54.8,-26.375 -54.788,-26.388 -54.788,-17.11 R4_DC/DC-B.1@-55.181,-17.11
NetH2_1: H2.1 U1.6 | length 61.5
  Top Layer w0.4: U1.6 -63.317,-53.792
  Top Layer w0.5: -63.317,-53.792 -62.611,-53.086 v2(-60.579,-53.086)
  Bottom Layer w0.5: v2(-60.579,-53.086) -59.944,-53.086 -59.563,-52.705 -22.733,-52.705 -19.05,-56.388 -19.05,-62.103 H2.1@-14.414,-66.739
NetH2_2: H2.2 U1.7 | length 60.7
  Top Layer w0.4: U1.7 -64.826,-53.142
  Top Layer w0.5: -64.826,-53.142 -64.389,-52.705 -63.754,-52.705 v2@-62.484,-51.435
  Bottom Layer w0.5: v2@-62.357,-51.435 -22.352,-51.435 -17.907,-55.88 -17.907,-60.96 -15.113,-63.754 -14.732,-63.754 H2.2
  other v2: -62.357,-51.562
NetH2_3: H2.3 U1.10 | length 59.3
  Top Layer w0.4: U1.10 -63.678,-51.192
  Top Layer w0.5: -63.628,-51.142 -62.397,-49.911 v2(-60.325,-49.911)
  Bottom Layer w0.5: v2@-60.262,-49.847 -59.817,-50.292 -21.082,-50.292 -16.637,-54.737 -16.637,-59.69 H2.3@-14.986,-61.341
NetH3_3: H3.3 R16.2 | length 2.4
  Top Layer w0.5: R16.2@-15.383,-40.894 H3.3
NetH_DC-DC_pot_DC/DC-A_1: H_DC-DC_pot_DC/DC-A.1 POT1_DC/DC-A.3 | length 14.1
  Top Layer w1.27: POT1_DC/DC-A.3@-13.843,-17.786 -11.049,-20.58 H_DC-DC_pot_DC/DC-A.1@-11.049,-30.734
NetH_DC-DC_pot_DC/DC-A_2: H_DC-DC_pot_DC/DC-A.2 POT1_DC/DC-A.2 | length 3.4
  Top Layer w1.27: H_DC-DC_pot_DC/DC-A.2@-13.843,-31.242 POT1_DC/DC-A.2@-13.843,-27.813
NetH_DC-DC_pot_DC/DC-A_3: H_DC-DC_pot_DC/DC-A.3 POT1_DC/DC-A.1 | length 9.1
  Top Layer w1.27: H_DC-DC_pot_DC/DC-A.3@-16.51,-30.861 -16.51,-25.533 POT1_DC/DC-A.1@-13.843,-22.866
NetH_DC-DC_pot_DC/DC-B_1: H_DC-DC_pot_DC/DC-B.1 POT1_DC/DC-B.3 | length 14.6
  Top Layer w1.27: POT1_DC/DC-B.3@-85.915,-16.85 -83.312,-19.453 H_DC-DC_pot_DC/DC-B.1@-83.312,-30.375
NetH_DC-DC_pot_DC/DC-B_2: H_DC-DC_pot_DC/DC-B.2 POT1_DC/DC-B.2 | length 3.4
  Top Layer w1.27: H_DC-DC_pot_DC/DC-B.2@-85.915,-30.439 POT1_DC/DC-B.2@-85.915,-27.01
NetH_DC-DC_pot_DC/DC-B_3: H_DC-DC_pot_DC/DC-B.3 POT1_DC/DC-B.1 | length 9.7
  Top Layer w1.27: H_DC-DC_pot_DC/DC-B.3@-88.582,-30.566 -88.582,-24.597 POT1_DC/DC-B.1@-85.915,-21.93
NetL1_1: L1.1 Q2.1 Q2.2 Q2.3 Q3.5 | length 16
  Top Layer w2: -55.499,-55.753 -55.499,-51.054 -53.213,-51.054 -53.213,-48.006 -53.213,-47.879 L1.1@-53.213,-42.037
  other v1: -54.015,-48.355 -53.015,-48.355 -52.015,-48.355 -51.015,-48.355 -54.015,-47.355 -53.015,-47.355 -52.015,-47.355 -51.015,-47.355 -54.015,-46.355 -53.015,-46.355 -52.015,-46.355 -51.015,-46.355 -54.015,-45.355 -53.015,-45.355 -52.015,-45.355 -51.015,-45.355 -54.015,-44.355 -53.015,-44.355 -52.015,-44.355 -51.015,-44.355
NetL1_2: L1.2 R15.2 U1.21 | length 35.9
  Top Layer w0.4: U1.21 -71.094,-55.092 -70.485,-54.483 v2(-70.485,-52.451) ; v2(-56.515,-40.386) -53.769,-37.767 L1.2@-53.594,-35.989
  Top Layer w2: L1.2@-53.594,-35.989 R15.2@-47.19,-35.989
  Bottom Layer w0.4: v2(-70.485,-52.451) -69.85,-52.451 -57.785,-40.386 v2(-56.515,-40.386)
NetLD1_1: LD1.1 R1.1 | length 3.9
  Top Layer w1: LD1.1 -71.628,-77.343 -70.485,-76.2 R1.1@-70.485,-74.803
NetLD1_2: LD1.2 Q0.5 SOLDERGUN.4 | length 15.5
  Top Layer w1: -76.454,-77.343 LD1.2@-74.676,-77.343
  Top Layer w1.27: -76.073,-74.295 -76.327,-74.549 -76.327,-81.045 -73.439,-83.933 SOLDERGUN.4
  other v1: -76.113,-75.025 -75.113,-75.025 -74.113,-75.025 -73.113,-75.025 -76.113,-74.025 -75.113,-74.025 -74.113,-74.025 -73.113,-74.025 -76.113,-73.025 -75.113,-73.025 -74.113,-73.025 -73.113,-73.025 -76.113,-72.025 -75.113,-72.025 -74.113,-72.025 -73.113,-72.025 -76.113,-71.025 -75.113,-71.025 -74.113,-71.025 -73.113,-71.025
NetLD_3.3V_OK_2: LD_3.3V_OK.2 R8.1 | length 1.4
  Top Layer w1: R8.1 -37.37,-38.862
NetLD_19.5V_OK_2: LD_19.5V_OK.2 R12.1 | length 1.9
  Top Layer w1: R12.1 LD_19.5V_OK.2
NetQ2_4: Q2.4 U1.1 | length 11.2
  Top Layer w0.4: -66.273,-57.298 U1.1
  Top Layer w0.5: -66.273,-57.298 -65.64,-57.931 -55.627,-57.931
NetQ3_4: Q3.4 U1.3 | length 20.2
  Top Layer w0.4: U1.3 -60.187,-55.742
  Top Layer w0.5: -60.187,-55.742 -58.039,-53.594 v2(-58.039,-44.577)
  Bottom Layer w0.5: v2(-58.039,-44.577) -57.912,-44.45 Q3.4
NetQ4_4: Q4.4 U1.4 | length 16.6
  Top Layer w0.4: U1.4 -64.694,-55.092 -64.339,-54.737
  Top Layer w0.5: v2(-65.659,-61.976) -64.516,-63.119 Q4.4 ; -64.339,-54.737 -63.272,-54.737 -63.018,-54.483 v2(-61.849,-54.483)
  Bottom Layer w0.5: v2(-65.659,-61.976) -65.659,-58.293 v2(-61.849,-54.483)
NetR3_2: R3.2 U2.5 | length 5.2
  Top Layer w0.4: U2.5@-88.582,-74.422 -86.487,-74.422
  Top Layer w0.5: -86.487,-74.422 -86.487,-75.549 R3.2
NetR7_2: R7.2 U2.7 | length 3.8
  Top Layer w0.5: U2.7@-88.582,-71.882 -86.741,-71.882 -86.305,-71.446 -86.305,-70.54 -86.106,-70.342 R7.2@-85.979,-70.215
NetR10_2: R10.2 R14.1 U1.11 | length 14.1
  Top Layer w0.4: U1.11 -64.639,-50.542
  Top Layer w0.5: R14.1 R10.2 -63.881,-44.815 -63.881,-49.784 -64.639,-50.542
NetR17_1: R17.1 U1.16 | length 8.5
  Top Layer w0.4: -79.349,-51.842 U1.16
  Top Layer w0.5: R17.1@-81.026,-50.165 -79.349,-51.842
NetR18_1: R18.1 U1.15 | length 9.2
  Top Layer w0.4: -77.481,-51.192 U1.15
  Top Layer w0.5: R18.1@-80.921,-47.752 -77.481,-51.192
NetR20_2: R20.2 U1.14 | length 6.4
  Top Layer w0.4: -75.95,-50.542 U1.14
  Top Layer w0.5: R20.2 -77.216,-49.276 -75.95,-50.542
NetR22_2: R22.2 U1.13 | length 4.1
  Top Layer w0.4: -74.93,-49.784 -74.822,-49.892 U1.13
  Top Layer w0.5: -74.93,-49.784 R22.2
SCL: H3.5 H-I2C-1.3 H-I2C-1.4 H-I2C-2.3 H-I2C-2.4 IO1_DC/DC-A.5 IO1_DC/DC-B.5 R23.1 U1.9 | length 206.2
  Top Layer w0.3: -68.875,-13.503 IO1_DC/DC-B.5 ; -41.871,-13.042 IO1_DC/DC-A.5
  Top Layer w0.4: v2(-69.977,-15.24) -69.977,-14.605 -68.875,-13.503 ; v2(-69.088,-45.085) -69.088,-47.29 -69.215,-47.417 -69.215,-50.419 -67.792,-51.842 U1.9 ; v2(-43.561,-15.24) -43.561,-15.113 -43.752,-14.923 -41.871,-13.042
  Top Layer w0.5: R23.1@-7.382,-71.882 -5.842,-71.882 v2(-5.588,-71.628)
  Bottom Layer w0.4: v2(-69.977,-15.24) -71.393,-16.656 -71.393,-42.78 v2(-69.088,-45.085) ; -48.451,-15.24 -48.197,-15.24
  Bottom Layer w0.5: H3.5 -4.064,-45.974 ; v2(-5.588,-71.628) -3.937,-71.628 ; -3.937,-47.879 -3.937,-47.498
  Bottom Layer w1.27: v2(-69.977,-15.24) -48.451,-15.24 ; -48.197,-15.24 -20.193,-15.24 -18.923,-13.97 -18.923,-12.573 -18.161,-11.811 -6.731,-11.811 -3.937,-14.605 -3.937,-47.879 -3.937,-71.628 -3.937,-77.089 ; H-I2C-2.3 -3.81,-77.089
SDA: H3.6 H-I2C-1.1 H-I2C-1.2 H-I2C-2.1 H-I2C-2.2 IO1_DC/DC-A.6 IO1_DC/DC-B.6 R11.1 U1.8 | length 203.3
  Top Layer w0.3: -67.508,-14.153 IO1_DC/DC-B.6 ; -42.418,-14.986 -41.148,-13.716 IO1_DC/DC-A.6@-40.156,-13.716
  Top Layer w0.4: v2(-70.739,-47.371) -70.739,-50.165 -68.412,-52.492 U1.8 ; v2(-68.707,-17.145) -68.707,-15.367 -67.501,-14.16 -67.508,-14.153 ; v2(-42.418,-17.145) -42.418,-14.986
  Top Layer w0.5: H3.6 -3.81,-48.514 ; R11.1 -11.811,-72.787 H-I2C-2.2
  Top Layer w1.27: H-I2C-2.1 H-I2C-1.1 H-I2C-1.2 -3.556,-74.549 -3.556,-15.367 -4.953,-13.97 v2(-7.747,-13.97)
  Bottom Layer w0.4: v2(-70.739,-47.371) -68.58,-47.371 -67.818,-46.609 -67.818,-44.363 -70.358,-41.823 -70.358,-18.796 v2(-68.707,-17.145) ; -48.197,-17.526 -48.197,-17.145
  Bottom Layer w1.27: v2(-68.707,-17.145) -48.197,-17.145 ; -47.816,-17.145 -18.796,-17.145 -16.891,-15.24 -16.891,-14.351 -16.51,-13.97 v2(-7.747,-13.97)
SMB_TERMISTOR: H3.4 R17.2 R18.2 | length 83.2
  Top Layer w0.5: R17.2@-83.423,-50.038 R18.2@-83.423,-47.625 ; R18.2 -83.296,-46.466 -82.423,-45.593 -80.661,-45.593 ; -80.391,-45.593 -69.088,-34.29 v2(-68.961,-34.29)
  Bottom Layer w0.5: v2(-68.961,-34.29) -22.987,-34.29 -16.383,-40.894 -16.383,-42.799 -15.494,-43.688 H3.4@-13.208,-43.688
TEMP_ADC: D2.2 H-SOLDER.1 R2.1 SOLDERGUN.1 | length 18.2
  Top Layer w0.8: H-SOLDER.1@-93.091,-80.264 -88.773,-80.264 -87.63,-79.121 ; R2.1 -88.281,-78.216 -83.249,-83.248 SOLDERGUN.1@-83.249,-86.551
VCC3.3: C2_DC/DC-A.1 C2_DC/DC-B.1 C12.1 DC-DC-3V3.2 H3.3V.2 H3.3V.4 H3.3V.6 H3.3V.8 H-I2C-1.5 H-I2C-1.6 H-I2C-2.5 H-I2C-2.6 IO1_DC/DC-A.4 IO1_DC/DC-B.4 IO1_DC/DC-B.7 LD_3.3V_OK.1 OneWire.1 OneWire.2 R2.2 R11.2 R23.2 R24.2 U1.17 | length 424.9
  Top Layer w0.3: IO1_DC/DC-A.4 -35.742,-11.065
  Top Layer w0.4: -83.271,-52.492 U1.17 ; IO1_DC/DC-B.7 -64.587,-14.803 -64.135,-14.351 -64.135,-13.843 -63.795,-13.503 IO1_DC/DC-B.4 -60.364,-11.065 C2_DC/DC-B.1
  Top Layer w0.5: v2(-94.234,-50.419) -85.344,-50.419 -83.271,-52.492 ; -17.018,-69.596 -16.764,-69.85 -11.414,-69.85 R23.2@-9.382,-71.882 ; -16.891,-71.755 R11.2
  Top Layer w0.6: -35.742,-11.065 C2_DC/DC-A.1
  Top Layer w0.8: -35.687,-1.675 -35.687,-10.43 C2_DC/DC-A.1
  Top Layer w1: R2.2@-90.424,-76.168 v2@-88.265,-76.168 ; C2_DC/DC-B.1 -60.071,-7.833 ; -53.975,-81.28 -52.467,-79.772 R24.2 ; C12.1@-34.798,-45.402 LD_3.3V_OK.1@-34.798,-38.481
  Top Layer w1.27: v2(-93.472,-43.561) -90.678,-43.561 -87.884,-40.767 -83.185,-40.767 -73.152,-30.734 -73.152,-14.224 -68.707,-9.779 -62.017,-9.779 -60.071,-7.833 -60.071,-3.048 -58.698,-1.675 -35.687,-1.675 -22.074,-1.675 -11.938,-11.811 -3.81,-11.811 -1.786,-13.835 -1.786,-75.282 -2.286,-75.782 -2.286,-84.328 -2.794,-84.836 H3.3V.8@-6.223,-84.836 ; OneWire.1 -53.975,-81.28 ; H-I2C-2.5 -2.286,-79.629
  Top Layer w2: C12.1@-34.798,-45.402 -34.036,-46.164 -32.385,-46.164 -32.385,-56.134 -29.845,-56.134 -28.829,-55.118 -20.32,-55.118 -17.018,-58.42 -17.018,-69.596 -17.018,-84.963 H3.3V.8
  Bottom Layer w1: v2@-88.281,-76.216 v2(-88.265,-76.2)
  Bottom Layer w1.27: v2@-94.361,-50.292 -93.472,-49.403 v2(-93.472,-43.561) ; v2(-94.234,-50.419) -94.234,-65.151 -88.265,-71.12 v2(-88.265,-76.2) ; v2@-88.281,-76.216 -88.281,-78.502 -57.007,-78.502 -55.88,-79.629 OneWire.2@-55.88,-83.058
VCC5V: C14.1 Con1.1 DC-DC-5V.2 H6.2 H6.4 | length 42
  Top Layer w2: C14.1@-45.657,-77.851 -44.958,-77.851 -37.211,-70.104 -30.48,-70.104 DC-DC-5V.2@-30.353,-70.104
  Top Layer w3: Con1.1 -46.355,-78.549 C14.1@-45.657,-77.851
  Bottom Layer w2: DC-DC-5V.2@-30.48,-70.104 -28.956,-70.104 -27.559,-68.707 -27.559,-61.468 -26.289,-60.198 H6.2@-23.622,-60.198
VCC12V: C15.1 Con1.4 DC-DC-12V.2 H5.2 H5.4 U2.1 U2.8 | length 95.6
  Top Layer w0.5: U2.1 U2.8 -88.519,-70.295 v2(-88.519,-68.072)
  Top Layer w2: DC-DC-12V.2@-33.02,-78.105 -30.48,-78.105 Con1.4@-30.48,-85.217
  Top Layer w3: Con1.4 -29.019,-87.948 C15.1 -20.828,-84.431
  Bottom Layer w0.5: v2(-88.519,-68.072) -86.995,-69.596 -86.995,-76.835 -34.29,-76.835 DC-DC-12V.2@-33.02,-78.105
VCC19.5: C3.1 C13.1 D1.2 DC-DC-3V3.0 DC-DC-5V.0 DC-DC-12V.0 DC/DC_DC/DC-A.0 DC/DC_DC/DC-B.0 H1.2 LD_19.5V_OK.1 MAIN_POWER_CON.3 Q4.5 R1.2 R10.1 SOLDERGUN.5 U1.5 | length 279.4
  Top Layer w0.4: -74.422,-61.849 v2(-74.422,-59.944) ; v2@-69.342,-58.039 -69.342,-55.372 -68.412,-54.442 U1.5
  Top Layer w0.8: D1.2@-68.936,-69.342 -67.107,-69.342
  Top Layer w1: R1.2@-70.501,-72.517 -68.199,-72.517 ; -66.818,-33.258 -66.818,-39.878 R10.1 ; LD_19.5V_OK.1 -34.798,-56.476 -32.6,-58.674 DC-DC-3V3.0@-32.512,-58.674
  Top Layer w1.905: -96.901,-49.911 -96.901,-64.516 -86.868,-64.516 -84.582,-62.23 -70.993,-62.23 -70.231,-62.992 -68.199,-62.992 -67.564,-63.627 -67.564,-67.234 ; -70.549,-32.195 -54.8,-32.195 ; v1@-64.758,-67.234 -67.564,-67.234 ; MAIN_POWER_CON.3@-58.086,-90.241 -58.086,-93.741 -60.964,-93.741 -61.753,-92.952 -66.876,-92.952 -67.564,-92.263 -67.564,-67.234 ; -50.356,-91.631 -50.356,-76.517 -46.101,-72.263 -43.815,-72.263 C13.1@-38.608,-67.056 ; -37.719,-66.039 -31.433,-59.753 ; -31.135,-60.051 -32.512,-58.674 DC-DC-3V3.0@-29.972,-58.674
  Top Layer w2: -96.901,-49.911 -92.837,-45.847 -89.789,-45.847 -86.995,-43.053 -81.407,-43.053 -70.549,-32.195 ; MAIN_POWER_CON.3@-58.086,-93.741 -55.641,-93.741 -54.891,-92.991 -51.947,-92.991 -50.586,-91.631 ; DC/DC_DC/DC-B.0@-57.34,-28.915 -54.8,-28.915 -54.8,-32.195 -54.61,-32.385 -35.958,-32.385 -32.575,-29.003 DC/DC_DC/DC-A.0@-30.035,-29.003 ; C13.1 -37.275,-67.564 -28.448,-67.564 -27.559,-68.453 -27.559,-74.168 -28.829,-75.438 DC-DC-12V.0@-33.02,-75.438
  Bottom Layer w0.4: v2(-74.422,-59.944) -70.993,-59.944 v2(-69.215,-58.166)
  other v1: -64.611,-69.381 -63.611,-69.381 -62.611,-69.381 -61.611,-69.381 -60.611,-69.381 -64.611,-68.381 -63.611,-68.381 -62.611,-68.381 -61.611,-68.381 -60.611,-68.381 -64.611,-67.381 -63.611,-67.381 -62.611,-67.381 -61.611,-67.381 -60.611,-67.381 -64.611,-66.381 -63.611,-66.381 -62.611,-66.381 -61.611,-66.381 -60.611,-66.381
VCC_BAT: C7.1 H3.1 H3.2 H4.1 H4.2 R15.1 R19.1 U1.22 | length 105.1
  Top Layer w0.4: v2(-76.073,-57.277) -77.597,-57.277 -76.062,-55.742 U1.22 ; v2(-50.038,-41.783) -47.752,-41.783 R15.1@-46.803,-42.733
  Top Layer w0.5: R19.1 -86.503,-60.325 -80.645,-60.325 -77.597,-57.277
  Top Layer w2: R15.1@-47.117,-42.164 -43.815,-42.164 -43.307,-41.656 -43.307,-37.719 -40.767,-35.179 -32.258,-35.179 ; H4.2 H4.1 -32.258,-39.497 -32.258,-35.179 ; H3.2@-12.954,-38.481 -12.954,-35.179 -32.258,-35.179
  Bottom Layer w0.4: v2(-76.073,-57.277) -73.025,-57.277 -57.531,-41.783 v2(-50.038,-41.783)
pads on no net: CON_DC_DC.4 CON_DC_DC.5 MAIN_POWER_CON.12 MAIN_POWER_CON.13 SOLDERGUN.0

## Polygon pours and split planes (outlines as drawn)
GND on Top Layer "Top gnd" (solid, pour order 4): -99.568,-99.441 -0.127,-99.441 -0.127,0.127 -0.254,0 -99.822,0
GND on Bottom Layer "bottom gnd" (solid, pour order 6): -99.822,0 0.127,0 0,-0.127 0,-99.187 0,-99.314 0.127,-99.441 -99.822,-99.441

## Other copper
Top Layer:
  rectangle net NetL1_1: -54.61,-49.276 -49.911,-43.434
  region net NetD1_1: -76.835,-63.627 -76.835,-69.469 -71.882,-69.469 -71.882,-63.627
  region net NetLD1_2: -76.835,-70.104 -76.962,-70.231 -76.962,-75.819 -72.009,-75.819 -72.009,-70.104
Bottom Layer:
  region net NetC11_1: -53.721,-53.213 -53.721,-58.801 -49.149,-58.801 -49.022,-58.928 -49.022,-53.213
  region net VCC19.5: -65.405,-65.786 -65.405,-70.485 -59.817,-70.485 -59.817,-65.786

## Silkscreen, mask and mechanical layers (free items; w line width, h text height)
Top Overlay:
  lines w0.254: -99.822,-99.441 0,-99.441 0,0 -99.822,0 -99.822,-99.441
  text "BAT+" at -10.541,-37.338 h1.52
  text "BAT+" at -33.147,-38.227 h1.52
  text "KEY" at -10.668,-41.783 h1.52
  text "TEMP" at -10.668,-44.45 h1.52
  text "GND" at -32.512,-45.847 h1.52
  text "SCL" at -10.541,-46.99 h1.52
  text "SDA" at -10.541,-49.53 h1.52
  text "BAT-" at -10.541,-52.832 h1.52
  text "GND" at -12.319,-59.563 h1.52
  text "ACP" at -12.446,-62.357 h1.52
  text "SMBALERT" at -12.7,-65.024 h1.52
  text "CHGEN" at -12.573,-67.31 h1.52
  text "SDA" at -4.699,-75.184 h1.52
  text "SLC" at -4.699,-77.724 h1.52
  text "GND" at -64.262,-80.01 h1.52 r270
  text "3V3" at -54.356,-80.264 h1.52 r270
  text "3V3" at -4.699,-80.391 h1.52
  text "TEM" at -98.806,-81.153 h1.52
  text "GND" at -4.699,-83.058 h1.52
  text "M1" at -98.552,-83.693 h1.52
  text "5V" at -50.356,-84.328 h1.52
  text "12V" at -28.194,-84.582 h1.52
  text "3V3" at -4.699,-85.725 h1.52
  text "M0" at -98.552,-86.233 h1.52
  text "GND" at -4.699,-88.265 h1.52
  text "GND" at -98.552,-88.773 h1.52